# Altium PCB MS-003.22T003USB转接板PCB图 V1.0.PcbDoc
Units mil, origin at the board's own origin, x right, y up, seen from the top; angles counter-clockwise.
Board outline 2823.59 x 2105 mil, 2 copper layers (Top Layer, Bottom Layer), stack 61.756 mil thick; 20 components, 19 nets, 81 pads, 53 vias.
Unrouted connection lines stored in the file: 11.
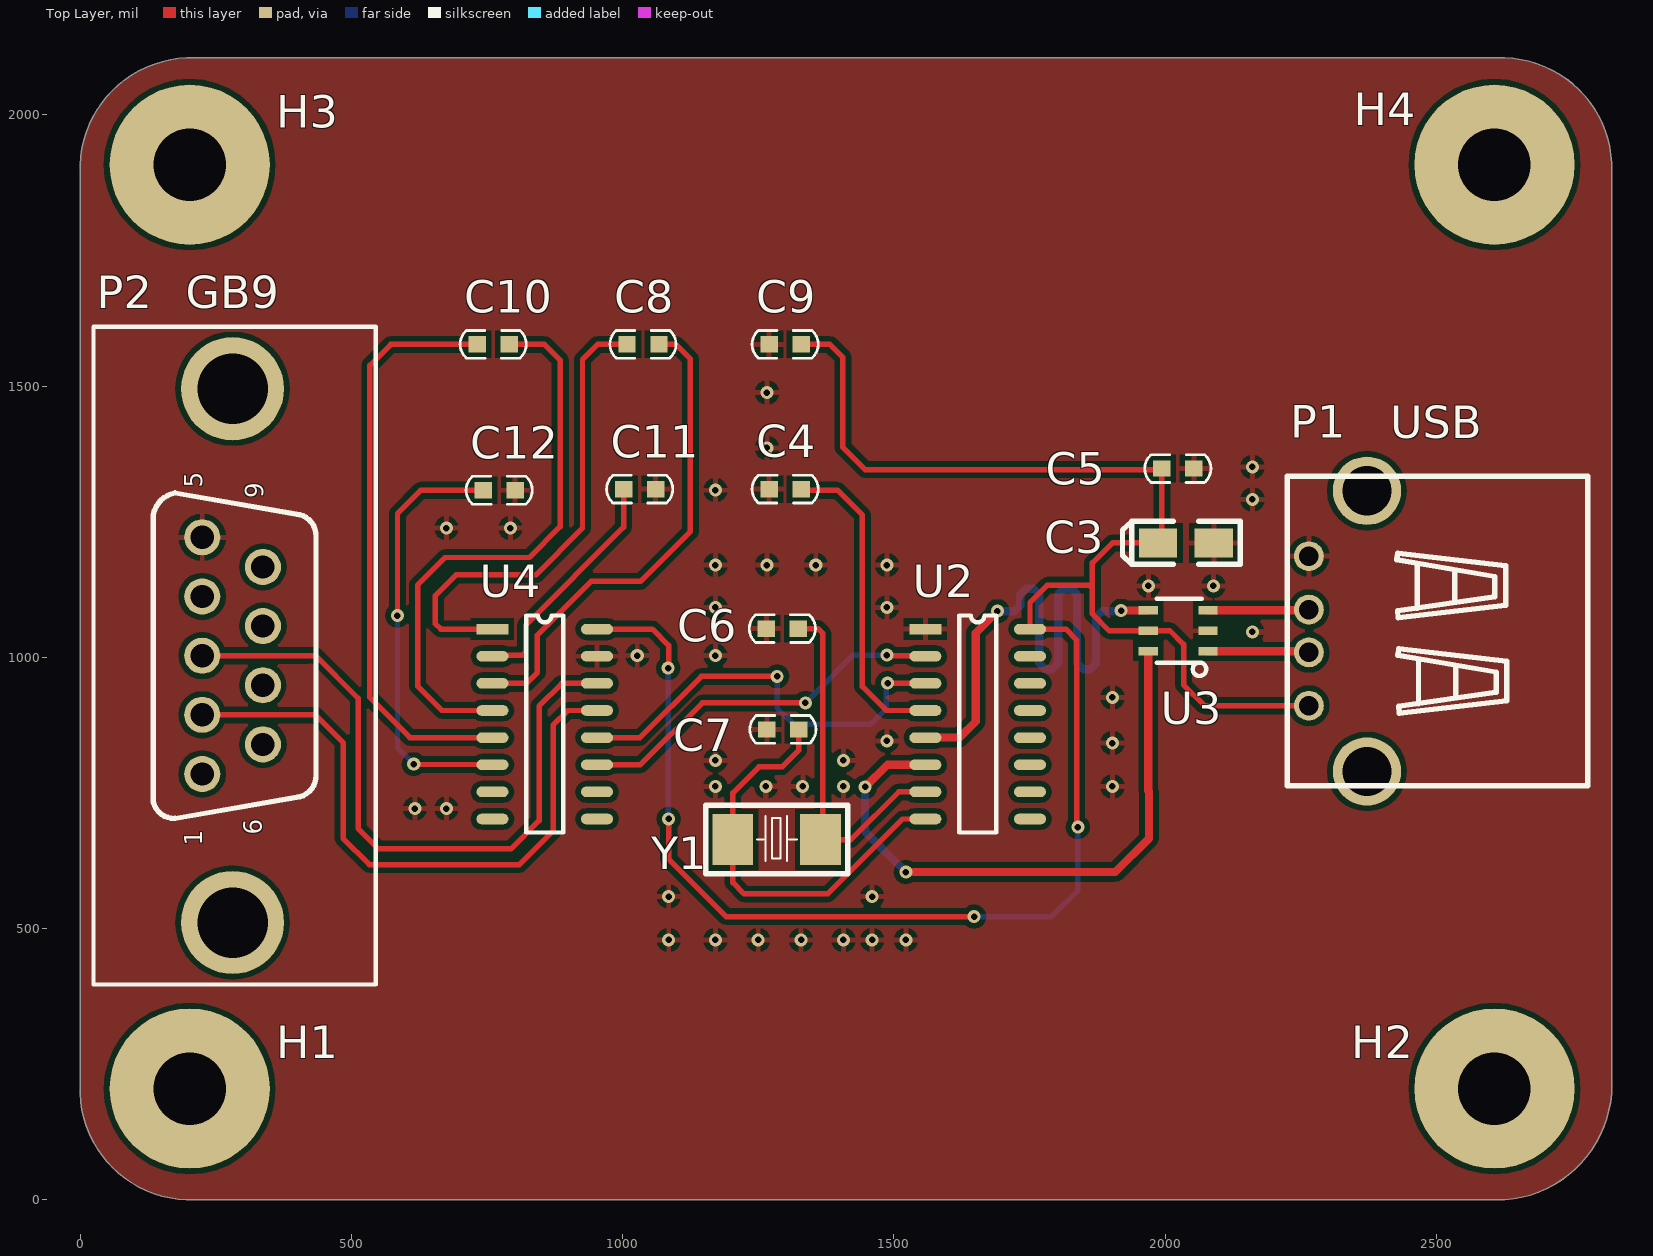
[diagram p0: Top Layer view]
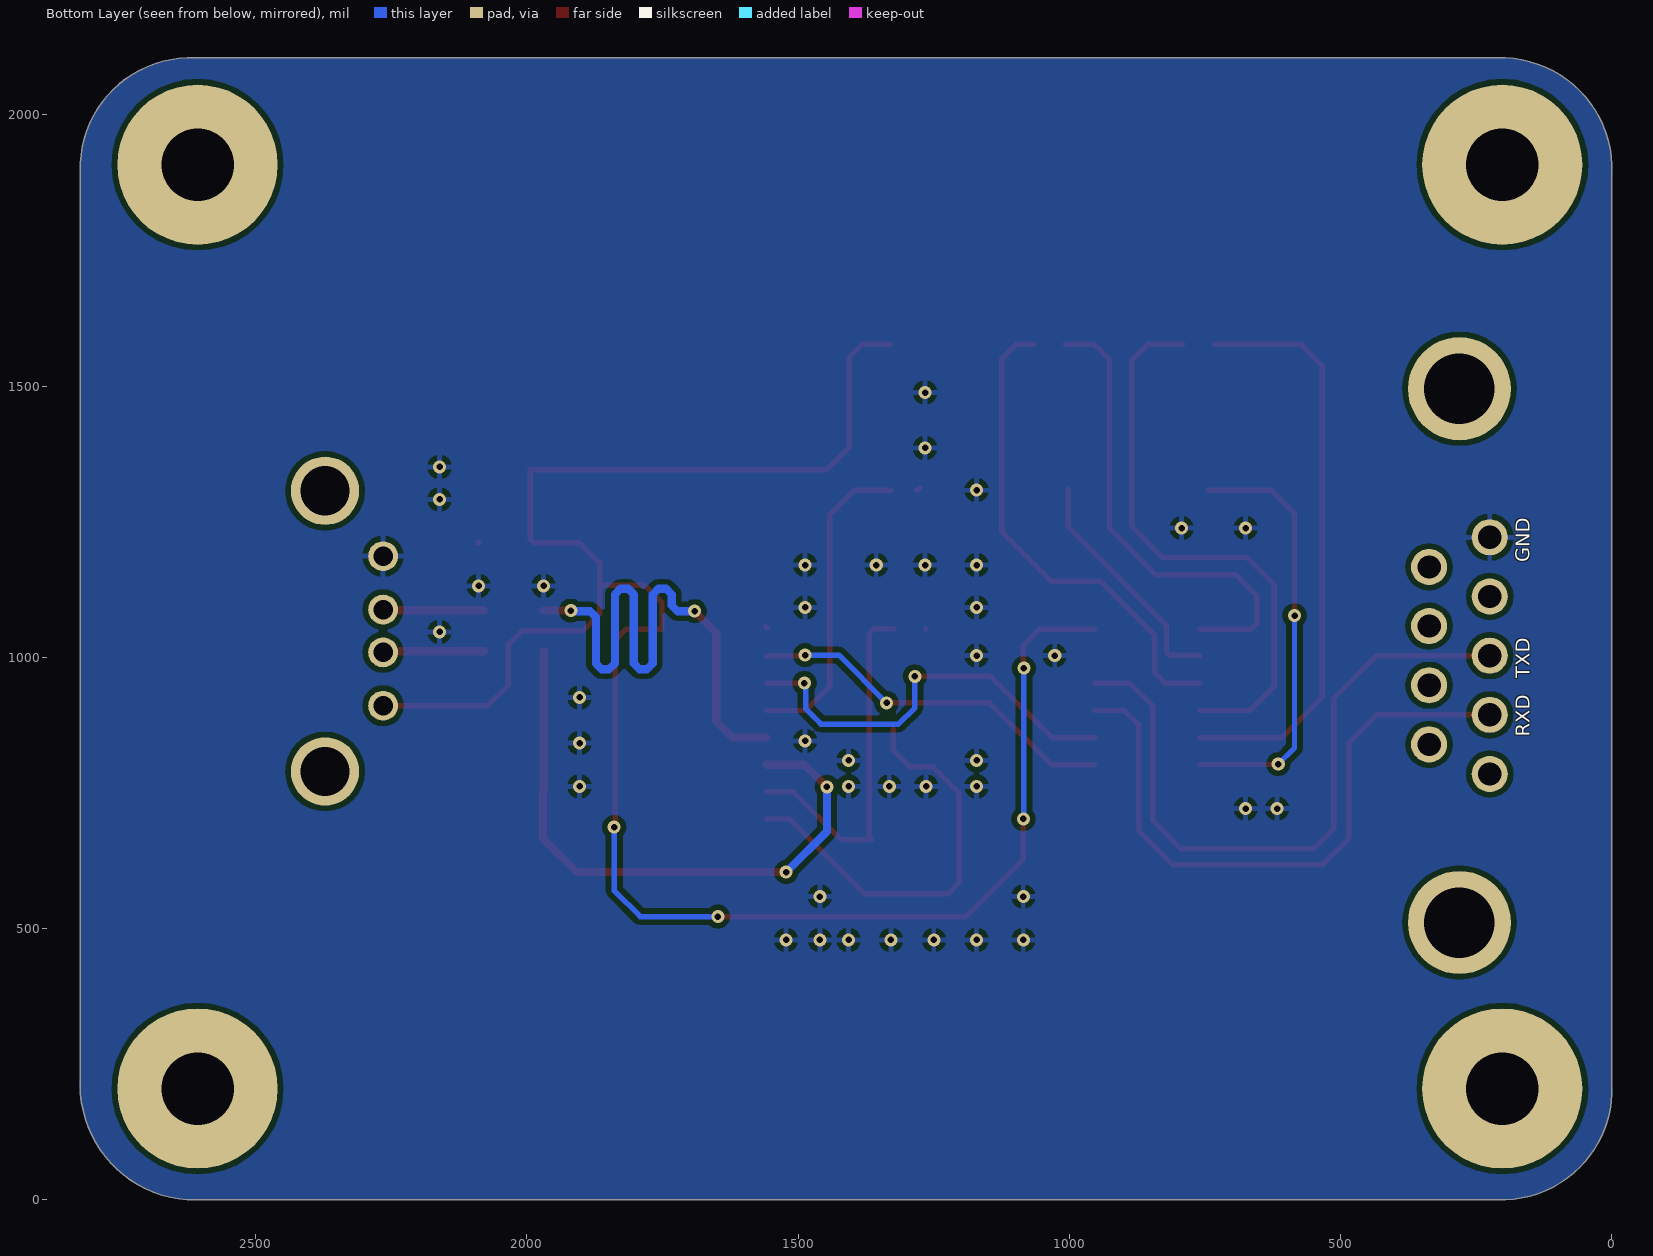
[diagram p1: Bottom Layer view, seen from below]

## Layer stack, top to bottom
Top Solder: solder mask 1, SM-001, Dk 4
Top Layer: signal copper 1.378
Dielectric 1: core 59, Core-043, Dk 4.3
Bottom Layer: signal copper 1.378
Bottom Solder: solder mask 1, SM-001, Dk 4

## Board outline
196,0 cw(c203.5,203.5) 0,211 0,1892 cw(c205,1900) 197,2105 2626,2105 cw(c2620,1902) 2823,1896 2823,228 cw(c2610.5,212.5) 2626,0

## Design rules (kind name [scope] priority, off if disabled: settings)
Clearance [All] p1: gap=10 ignorepadtopadclearanceinfootprint=FALSE except(0: Arc-Hole Track-Hole SMDPad-Hole THPad-Hole Via-Hole Fill-Hole Poly-Hole Region-Hole Text-Hole)
DiffPairsRouting DiffPair_D_DiffPairsRouting [InDifferentialPair ('D')] p1: maxlimit=10 minlimit=10 mostfreqgap=10 toplayer_minwidth=15 toplayer_maxwidth=15 toplayer_prefwidth=15 bottomlayer_minwidth=15 bottomlayer_maxwidth=15 bottomlayer_prefwidth=15 maxuncoupledlength=500
DiffPairsRouting [All] p2: maxlimit=10 minlimit=10 mostfreqgap=10 toplayer_minwidth=15 toplayer_maxwidth=15 toplayer_prefwidth=15 bottomlayer_minwidth=15 bottomlayer_maxwidth=15 bottomlayer_prefwidth=15 maxuncoupledlength=500
HoleSize [All] p1: absolutevalues=TRUE maxlimit=150 minlimit=1 maxpercent=80.000 minpercent=20.000
MatchedLengths DiffPair_D_MatchedLengths [InDifferentialPair ('D')] p1: tolerance=1000 checknetsindiffpair=FALSE checkdiffpairvsdiffpair=TRUE checkxsignals=TRUE checkothers=TRUE
MinimumSolderMaskSliver [All] p1: minsoldermaskwidth=1
PolygonConnect [All] p1: connectstyle=Relief reliefconductorwidth=10 reliefentries=4 polygonreliefangle="90 Angle" airgapwidth=10
RoutingVias [All] p1: holewidth=12 width=24 viastyle="Through Hole" minholewidth=8 minwidth=12 maxholewidth=100 maxwidth=120
SilkToSilkClearance [All] p1: silktosilkclearance=1
SilkToSolderMaskClearance [IsPad] p1: minsilkscreentomaskgap=0 clearancetoexposedcopper=TRUE
SolderMaskExpansion [All] p1: expansion=4 istentingtop=FALSE
Width [All] p1: maxlimit=10 minlimit=10 preferedwidth=10
25 further rules are at their usual default settings.

## Classes and differential pairs
differential pair I/O: +I/O_P -I/O_N
differential pair D: +D_P -D_N

## Components (designator, comment, footprint, x,y, rotation, side; value= is the part's Value field where it differs from the comment)
C3 "10uF/16V" CASE-A_3216 2038.4,1210.96 r180 top
C4 "0.1uF" 0603_C 1269.97,1309.96 r0 top
C5 "0.1uF" 0603_C 2052.97,1347.96 r180 top
C6 "22pF" 0603_C 1264.97,1052.81 r0 top
C7 "22pF" 0603_C 1265.97,866.96 r0 top
C8 "0.1uF" 0603_C 1007.97,1576.96 r0 top
C9 "0.1uF" 0603_C 1269.97,1576.96 r0 top
C10 "0.1uF" 0603_C 790.97,1576.96 r180 top
C11 "0.1uF" 0603_C 1060.97,1309.96 r180 top
C12 "0.1uF" 0603_C 801.97,1307.96 r180 top
H1 "=Value" THC7R5D3R4-M3-PTH 202,205 r0 top
H2 "=Value" THC7R5D3R4-M3-PTH 2607,205 r0 top
H3 "=Value" THC7R5D3R4-M3-PTH 202,1908 r0 top
H4 "=Value" THC7R5D3R4-M3-PTH 2607,1908 r0 top
P1 "U-USBAR04P-F002" "USB - duplicate" 2318.47,1048.26 r90 top
P2 "D-DMS009PM-F000" DSUB-TH_DMS009PM000XH00 280.97,1003.03 r90 top
U2 "CH340G" NSOIC-16 1557.97,1051.96 r0 top
U3 "USBLC6-2SC6" SOT23-6 2023.97,1048.96 r270 top
U4 "SP3232" NSOIC-16 759.97,1051.96 r0 top
Y1 "12MHz" "OSC-SMD 5.0×3.2" 1283.97,663.96 r180 top

## Footprints (in the part's own frame and the unit in brackets; to place one, negate y for a bottom-side part, rotate by r counter-clockwise, add the part's x,y. Pads: shape width x height; smd on the part's side, far side on the other; paste and mask are expansions set on the pad)
0603_C [mil]
  rect 32x30 smd: 1(0,0) 2(59,0)
  silkscreen extent -31,-26 91,26
CASE-A_3216 [mm]
  rect 1.8x1.35 smd: 1(1.31,0) 2(-1.31,0)
  silkscreen extent -2.54,-1 2.97,1, body extent -1.7,-0.84 1.7,0.84, height 1.71
DSUB-TH_DMS009PM000XH00 [mm]
  round 1.69 hole 1.09: 1(-5.54,1.42) 2(-2.77,1.42) 3(0,1.42) 4(2.77,1.42) 5(5.54,1.42) 6(-4.155,-1.42) 7(-1.385,-1.42) 8(1.385,-1.42) 9(4.155,-1.42)
  round 4.826 hole 3.302: 10(12.495,0) 11(-12.495,0)
  silkscreen extent -15.4,-6.7 15.4,6.51
NSOIC-16 [mm]
  rect 1.5x0.5 smd: 1(0,0)
  oval 1.5x0.5 smd: 2(0,-1.27) 3(0,-2.54) 4(0,-3.81) 5(0,-5.08) 6(0,-6.35) 7(0,-7.62) 8(0,-8.89) 9(4.9,-8.89) 10(4.9,-7.62) 11(4.9,-6.35) 12(4.9,-5.08) 13(4.9,-3.81) 14(4.9,-2.54) 15(4.9,-1.27) 16(4.9,0)
  silkscreen extent 1.58,-9.53 3.32,0.64
"OSC-SMD 5.0×3.2" [mm]
  rect 1.9x2.4 smd: 1(-2.05,0) 2(2.05,0)
  silkscreen extent -3.32,-1.6 3.33,1.6
SOT23-6 [mm]
  rect 0.4x0.9 smd: 1(0.95,1.4) 2(0,1.4) 3(-0.95,1.4) 4(-0.95,-1.4) 5(0,-1.4) 6(0.95,-1.4)
  silkscreen extent -1.5,-1 2.12,1.32
THC7R5D3R4-M3-PTH [mm]
  round 7.5 hole 3.4: 1(0,0)
"USB - duplicate" [mm]
  round 3.2 hole 2.3: 0(-6.571,-1.359) 0(6.571,-1.359)
  round 1.4 hole 0.92: 1(-3.492,1.359) 2(-0.993,1.359) 3(1.008,1.359) 4(3.508,1.359)
  silkscreen extent -7.25,-11.7 7.26,2.37

## Part data
C3: library part "Cap Pol", "Capacitor-P", LatestRevisionDate=29-May-2009, LatestRevisionNote="IPC-7351 Footprint Added.", PackageDescription="Chip Capacitor", PackageReference=C0805, Published=8-Jun-2000, Publisher="Altium Limited"
C4 C5: library part C0805, "C0805", PACKAGE=Tape&Reel, Allow Altenative Part=Y, Approved=YES, Categories=电容, Category=贴片电容, Modify time=2017年03月06号, Mounting Type=SurfaceMount, Part Number=C0805, Remark="BU 需求", serial number=4
C6 C7: library part C_2
C8 C9 C10 C11 C12: library part CAP
H1 H2 H3 H4: library part M4-PTH, Allow Altenative Part=Y, Approved=YES, Categories=符号, Category=SCREW, Modify time=42779, Part Number=M4-PTH, serial number=18, Supplier 1=CRD
P1: library part Mcro_usb
P2: Current Rating (Max)=3A, JLCPCB Part Class="Extended Part", LCSC Part Name="D-Sub 公 P数:9 DMS铆鱼叉锁螺丝 蓝胶芯(DP-9公)", Manufacturer=Ckmtw(灿科盟), Operating Temperature Range=-55℃~+105℃, Add into BOM=yes, Connector Type=D-Sub, Convert to PCB=yes, Device=D-DMS009PM-F000, Gender=公, Manufacturer Part=D-DMS009PM-F000, Mounting Style=直插, Name=D-DMS009PM-F000, Number of Pins=9, Number of Rows=2, Supplier=LCSC, Supplier Footprint=插件, Supplier Part=C183529, Symbol=DMS009PM000XH00
U2: "USB", PACKAGE=SOIC-16_150mil, SuppliersPartNumber=C14267, ComponentLink1Description=供应商链接, ComponentLink1URL=http://www.szlcsc.com/product/details_14927.html, Supplier=LC
Y1: library part XTAL, "Crystal Oscillator", LatestRevisionDate=17-Jul-2002, LatestRevisionNote="Re-released for DXP Platform.", Published=8-Jun-2000, Publisher="Altium Limited"

## Via types
v1: diameter 24, hole 12, Top Layer to Bottom Layer, tented both sides, 53 vias

## Nets (pads, with @x,y where several pads share a name; then routed paths per layer and width w, separated by ;. In a path a pad name is that pad's centre, name@x,y a point inside that pad or via, vN(x,y) a via of type N, cw(c..) or ccw(c..) an arc to the next point about the centre after c; other vN are vias at no path point)
5V_USB: C3.1 C5.2 C9.2 P1.1 U2.16 U3.5 U4.16 | length 3836
  Top Layer w10: U4.16 1054.97,1051.96 1084.97,1021.96 1084.97,980.96 v1(1083.97,979.96) ; v1(1084.97,701.96) 1084.97,627.96 1190.97,521.96 v1(1647.97,521.96) ; C9.2 1381.97,1576.96 1405.97,1552.96 1405.97,1386.96 1446.97,1345.96 1991.97,1345.96 C5.2 1993.97,1218.11 C3.1 1902.97,1210.96 1865.97,1173.96 1865.97,1126.96 ; v1(1838.97,686.96) 1836.97,688.96 1836.97,1031.96 1816.97,1051.96 U2.16 1750.89,1100.88 1782.97,1132.96 1859.97,1132.96 1865.97,1126.96 ; P1.1 2072.17,910.76 2033.97,948.96 2033.97,1023.96 2008.97,1048.96 U3.5 1896.97,1048.96 1865.97,1079.96 1865.97,1126.96
  Bottom Layer w10: v1(1083.97,979.96) 1083.97,702.96 v1(1084.97,701.96) ; v1(1647.97,521.96) 1790.97,521.96 1838.97,569.96 v1(1838.97,686.96)
D_N: P1.2 U3.1 | length 186.9
  Top Layer w10: P1.2@2263.77,1010.36 P1.2
  Top Layer w15: U3.1 2079.47,1011.19 2262.95,1011.19 P1.2@2263.77,1010.36
D_P: P1.3 U3.3 | length 186.5
  Top Layer w10: P1.3@2264.17,1087.16 P1.3
  Top Layer w15: U3.3 2079.47,1086.74 2263.75,1086.74 P1.3@2264.17,1087.16
GND: C3.2 C4.1 C5.1 C6.1 C7.1 C9.1 C11.1 C12.1 P1.4 P2.5 U2.1 U3.2 U4.15 | length 14.9
  Top Layer w10: C6.1@1264.82,1052.96 C6.1 ; C4.1@1274.97,1312.96 1279.97,1307.96 C4.1@1280.97,1307.96 ; U2.1@1557.27,1054.1 U2.1@1559.97,1056.8 ; C3.2@2088.97,1211.96 C3.2 C3.2@2090.97,1211.96
  other v1: 1084.97,478.96 1170.97,478.96 1249.97,478.96 1328.97,478.96 1406.97,478.96 1459.97,478.96 1521.97,478.96 1084.97,558.96 1459.97,558.96 616.97,720.96 674.97,720.96 1170.97,761.96 1263.97,761.96 1331.97,761.96 1406.97,761.96 1902.97,761.96 1170.97,809.96 1406.97,809.96 1902.97,841.96 1486.97,845.96 1902.97,925.96 1026.97,1002.96 1170.97,1002.96 2160.97,1046.96 1170.97,1091.96 1486.97,1091.96 1969.3,1131.8 2088.97,1131.8 1170.97,1169.96 1265.97,1169.96 1355.97,1169.96 1486.97,1169.96 674.97,1237.96 792.97,1237.96 2160.97,1290.96 1170.97,1307.96 2160.97,1350.96 1265.97,1385.96 1265.97,1487.96
I/O_N: U2.5 U3.4 | length 1136
  Top Layer w15: U2.5 1620.97,851.96 1650.97,881.96 1650.97,1044.96 v1(1690.97,1084.96) ; v1(1918.97,1085.96) 1919.38,1086.36 U3.4
  Bottom Layer w15: v1(1690.97,1084.96) 1714.87,1084.96 1722.38,1084.96 1732.88,1095.46 1732.88,1115.96 1743.38,1126.46 1757.38,1126.46 1767.88,1115.96 1767.88,988.45 1778.38,977.95 1792.38,977.95 1802.88,988.45 1802.88,1115.96 1813.38,1126.46 1827.38,1126.46 1837.88,1115.96 1837.88,988.45 1848.38,977.95 1862.38,977.95 1872.88,988.45 1872.88,1074.46 1883.38,1084.96 1895.97,1084.96 1917.97,1084.96 v1(1918.97,1085.96)
I/O_P: U2.6 U3.6 | length 1135.8
  Top Layer w15: v1(1446.97,760.96) 1487.97,801.96 U2.6 ; v1(1521.97,603.96) 1907.97,603.96 1969.97,665.96 1969.97,752.96 1968.86,754.08 U3.6
  Bottom Layer w15: v1(1446.97,760.96) 1446.97,678.96 v1(1521.97,603.96)
NetC4_2: C4.2 U2.4 | length 582.3
  Top Layer w10: C4.2@1328.97,1307.96 1395.97,1307.96 1441.97,1261.96 1441.97,945.96 1485.97,901.96 U2.4
NetC6_2: C6.2 U2.7 Y1.1 | length 660.2
  Top Layer w10: C6.2 1360.19,1052.81 1368.97,1044.02 1368.97,668.25 Y1.1 1368.97,663.96 1420.97,663.96 1508.97,751.96 U2.7
NetC7_2: C7.2 U2.8 Y1.2 | length 778.3
  Top Layer w10: C7.2 1324.97,828.96 1293.97,797.96 1250.97,797.96 1203.26,750.25 Y1.2 1203.26,584.67 1223.97,563.96 1377.97,563.96 1515.97,701.96 U2.8
NetC8_1: C8.1 U4.1 | length 888.2
  Top Layer w10: U4.1 664.83,1051.96 654.97,1061.82 654.97,1113.96 692.97,1151.96 839.97,1151.96 925.97,1237.96 925.97,1548.96 953.97,1576.96 C8.1
NetC8_2: C8.2 U4.3 | length 908.6
  Top Layer w10: U4.3 822.97,951.96 842.97,971.96 842.97,1040.96 941.97,1139.96 1032.97,1139.96 1124.97,1231.96 1124.97,1549.96 1097.97,1576.96 C8.2
NetC10_1: C10.1 U4.4 | length 1063.4
  Top Layer w10: U4.4 666.97,901.96 621.97,946.96 621.97,1132.96 672.97,1183.96 827.97,1183.96 884.97,1240.96 884.97,1547.96 855.97,1576.96 C10.1
NetC10_2: C10.2 U4.5 | length 1082.8
  Top Layer w10: C10.2 572.97,1576.96 533.97,1537.96 533.97,925.96 607.97,851.96 U4.5
NetC11_2: C11.2 U4.2 | length 439.4
  Top Layer w10: U4.2 761.83,1003.82 788.36,1003.82 788.44,1003.89 815.12,1003.89 820.97,1009.75 820.97,1058.96 1001.97,1239.96 C11.2
NetC12_2: C12.2 U4.6 | length 795.7
  Top Layer w10: v1(584.97,1076.96) 584.97,1264.96 627.97,1307.96 C12.2 ; v1(614.97,802.96) 615.47,802.46 759.47,802.46 U4.6
  Bottom Layer w10: v1(584.97,1076.96) 584.97,832.96 v1(614.97,802.96)
NetP2_2: P2.2 U4.13 | length 1177.7
  Top Layer w10: P2.2 433.97,893.96 484.97,842.96 484.97,666 533.01,617.96 809.97,617.96 871.97,679.96 871.97,874.96 898.97,901.96 U4.13
TXD: P2.3 U4.14 | length 1267.3
  Top Layer w10: P2.3@220.97,994.96 P2.3@221.97,993.96 ; P2.3 225.16,1002.94 420.97,1002.94 421.04,1003 434,1003 512.47,924.53 512.47,684.53 550.04,646.96 793.96,646.96 845.97,698.97 845.97,909.96 887.97,951.96 U4.14
USART_RX: U2.3 U4.12 | length 780.2
  Top Layer w10: U4.12 1031.97,851.96 1144.97,964.96 v1(1284.97,964.96) ; v1(1488.47,952.46) 1557.47,952.46 U2.3
  Bottom Layer w10: v1(1284.97,964.96) 1284.97,906.96 1314.97,876.96 1457.97,876.96 1485.8,904.78 1485.8,949.78 v1(1488.47,952.46)
USART_TX: U2.2 U4.11 | length 690
  Top Layer w10: U4.11 1032.97,801.96 1146.97,915.96 v1(1336.97,915.96) ; v1(1486.97,1003.96) 1487.97,1002.96 1555.97,1002.96 1557.47,1001.46 U2.2
  Bottom Layer w10: v1(1336.97,915.96) 1424.97,1003.96 v1(1486.97,1003.96)
pads on no net: H1.1 H2.1 H3.1 H4.1 P1.0 P2.1 P2.4 P2.6 P2.7 P2.8 P2.9 P2.10 P2.11 U2.9 U2.10 U2.11 U2.12 U2.13 U2.14 U2.15 U4.7 U4.8 U4.9 U4.10

## Polygon pours and split planes (outlines as drawn)
GND on Top Layer "GND_L01_P000" (solid, pour order 0): 196,0 cw(c203.5,203.5) 0,211 0,1892 cw(c205,1900) 197,2105 2626,2105 cw(c2620,1902) 2823,1896 2823,228 cw(c2610.5,212.5) 2626,0
GND on Bottom Layer "GND_L02_P001" (solid, pour order 1): 196,0 cw(c203.5,203.5) 0,211 0,1892 cw(c205,1900) 197,2105 2626,2105 cw(c2620,1902) 2823,1896 2823,228 cw(c2610.5,212.5) 2626,0

## Silkscreen, mask and mechanical layers (free items; w line width, h text height)
Top Overlay:
  text "GB9" at 194.97,1643.53 h60
  text "USB" at 2414.97,1403.96 h60
Bottom Overlay:
  text "GND" at 142.5,1175 h45 r270
  text "TXD" at 142,961 h45 r270
  text "RXD" at 142,854 h45 r270
Mechanical 1:
  the board outline again, w10

## Text inside footprints (layer, text, board x,y; h text height)
P2: Top Overlay "5" at 225.14,1312.95 h32.69 r90; Top Overlay "9" at 337.86,1292.94 h32.69 r90; Top Overlay "6" at 335.13,672.95 h32.69 r90; Top Overlay "1" at 225.15,652.94 h32.69 r90